# Altium PCB SmartIMU_Pcb.PcbDoc
Units mil, origin at the board's own origin, x right, y up, seen from the top; angles counter-clockwise.
Board outline 1000 x 1000 mil, 4 copper layers (Top Layer, Mid Layer 1, Mid Layer 2, Bottom Layer), stack 24.2 mil thick; 36 components, 43 nets, 211 pads, 74 vias.
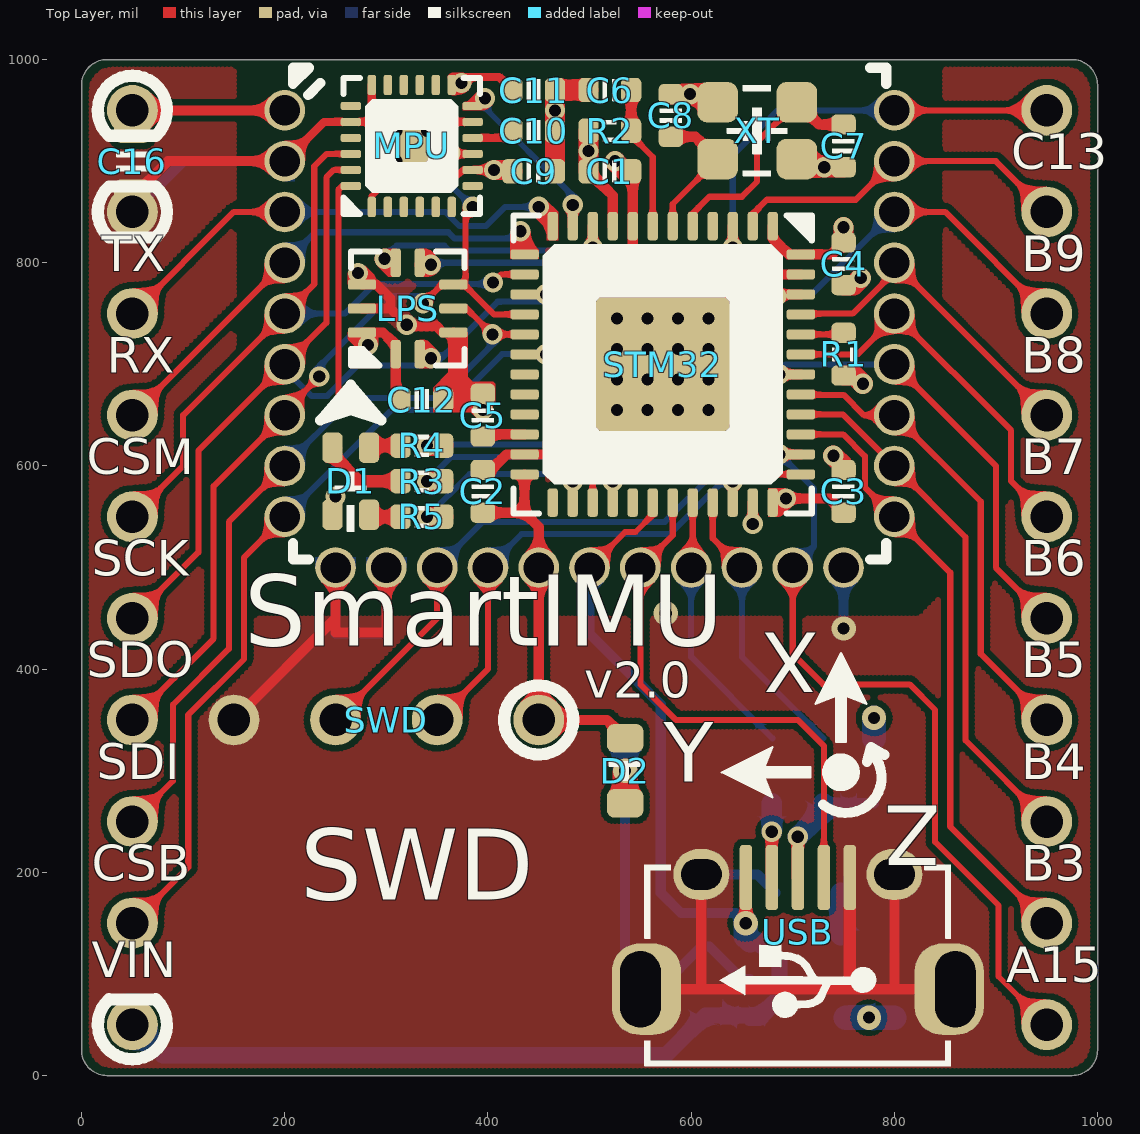
[diagram p0: Top Layer view]
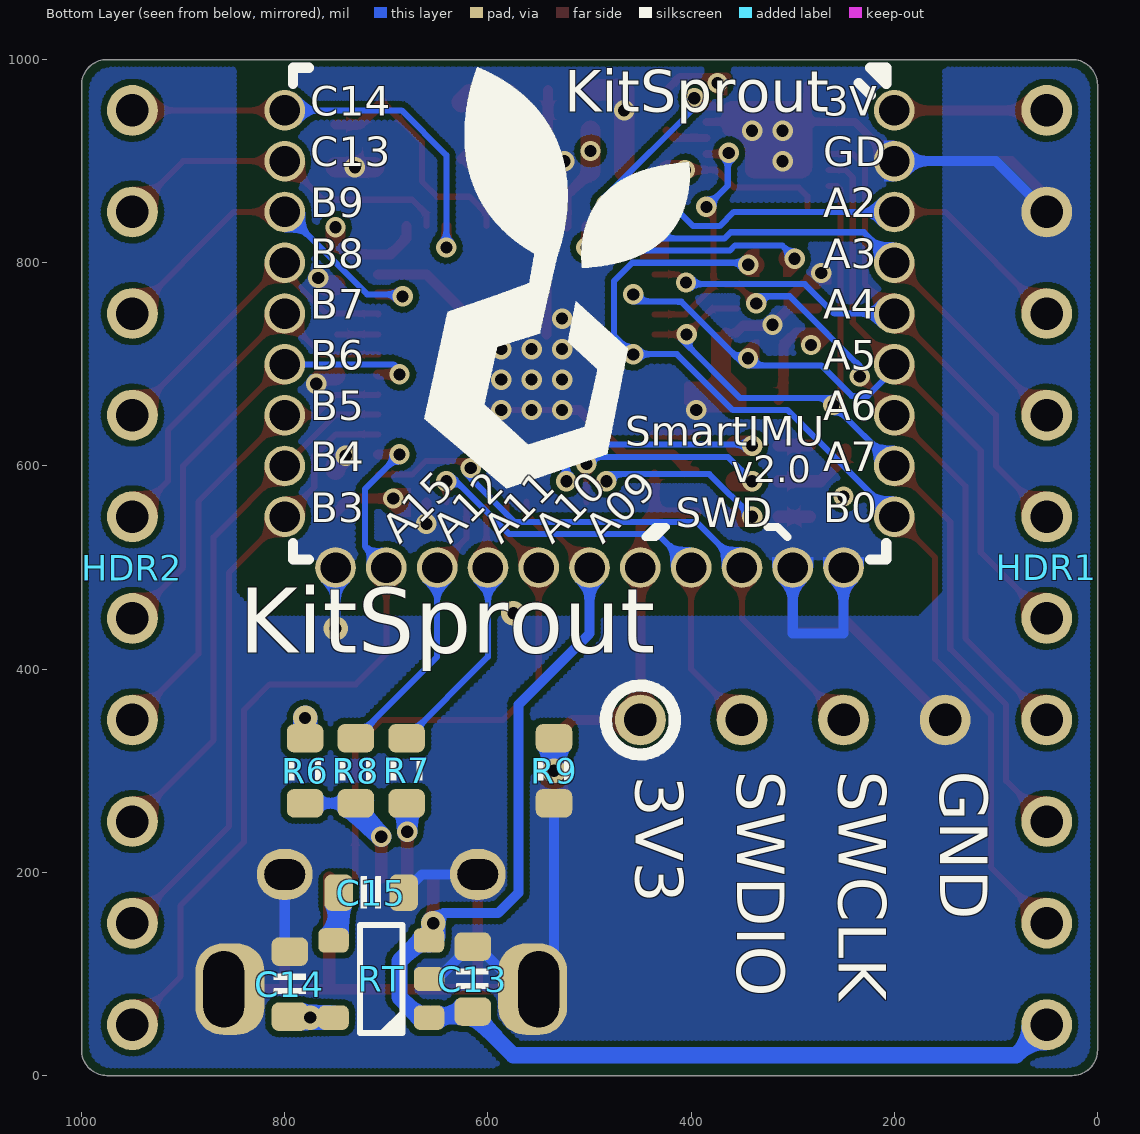
[diagram p1: Bottom Layer view, seen from below]
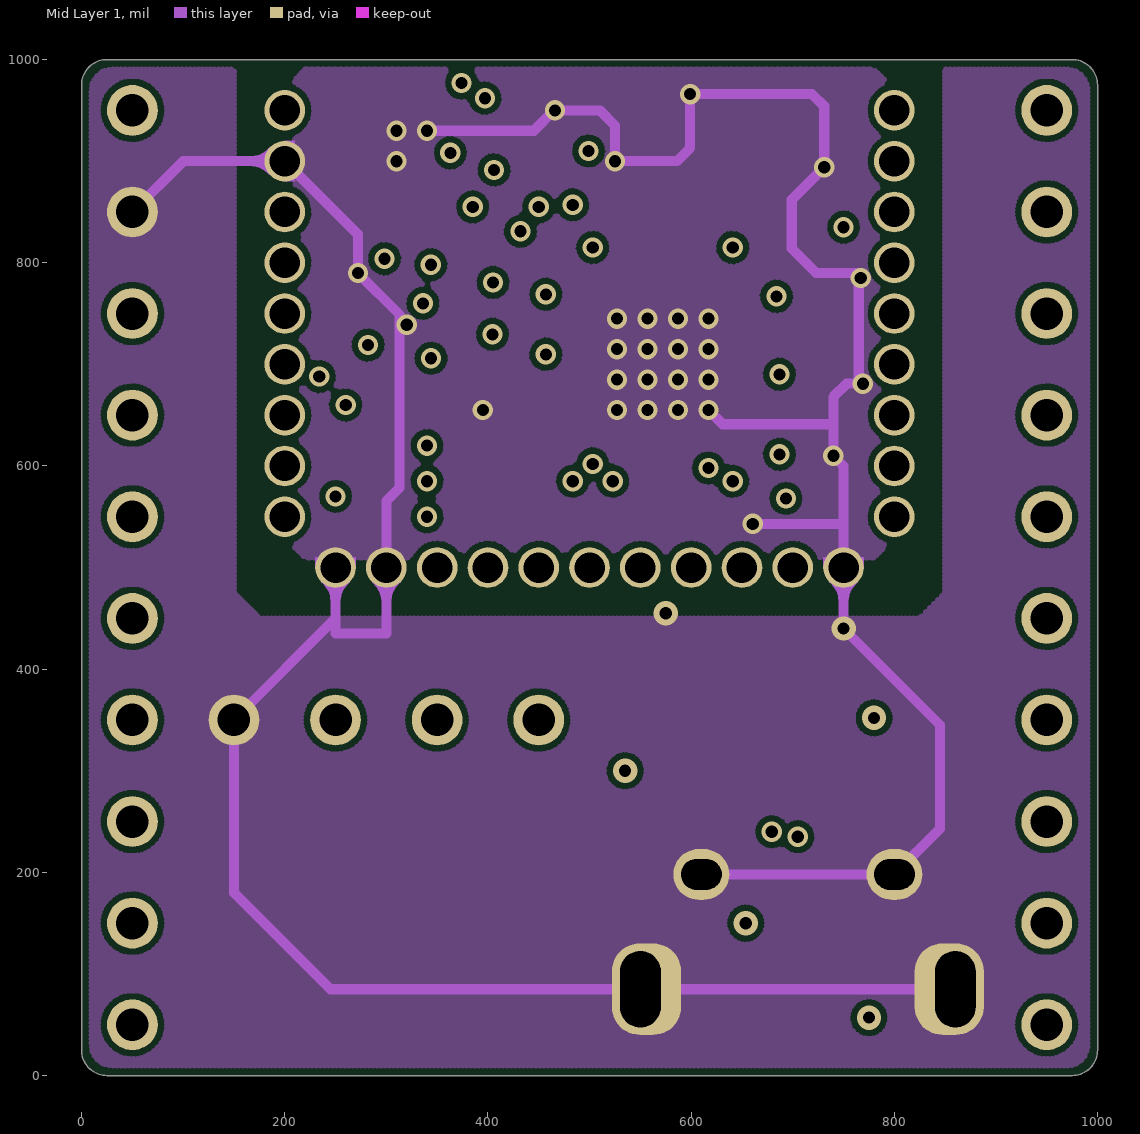
[diagram p2: Mid Layer 1]
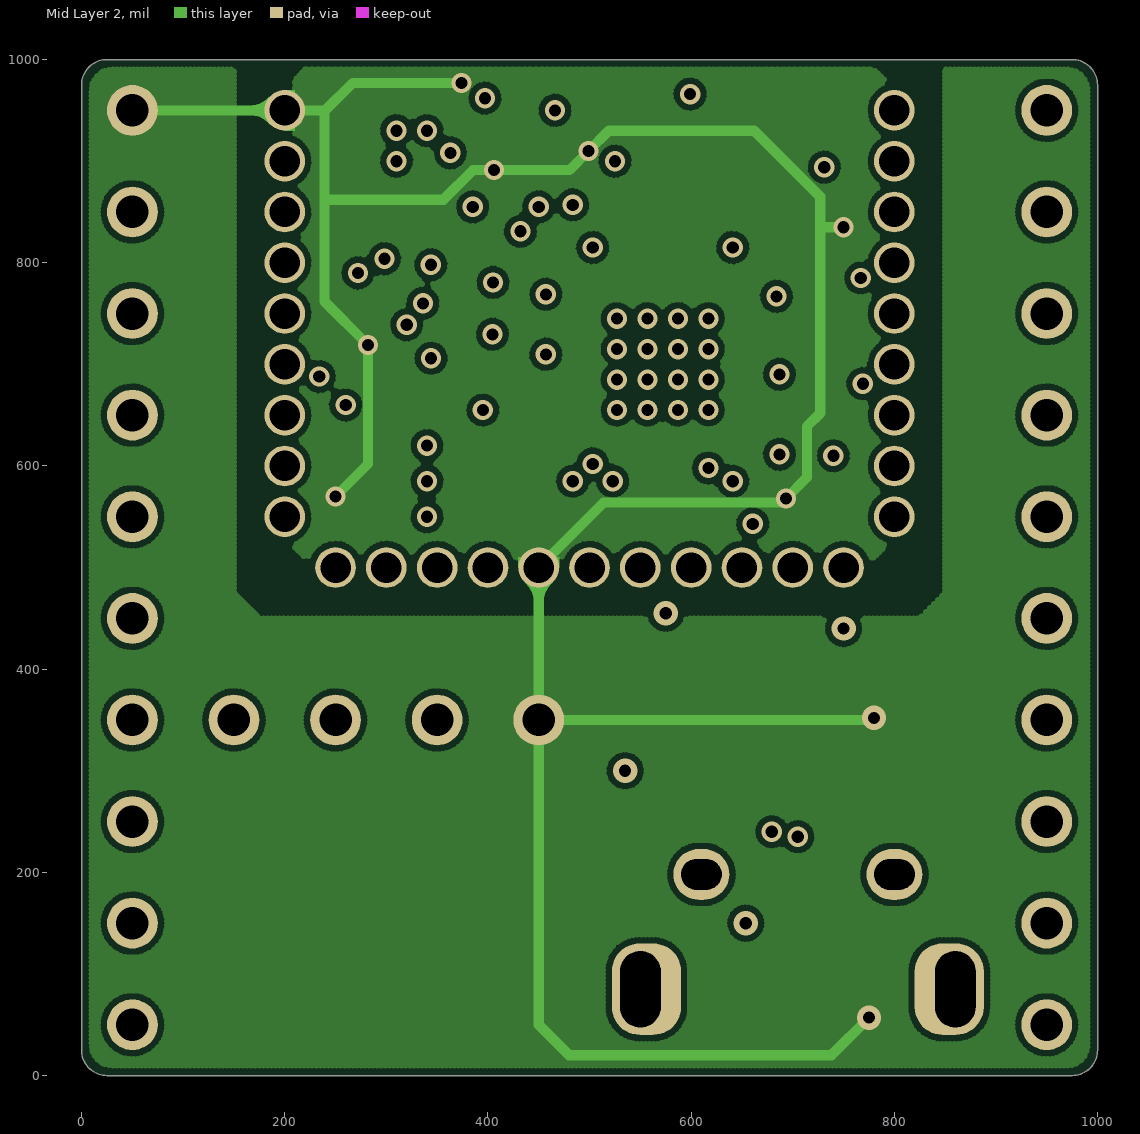
[diagram p3: Mid Layer 2]
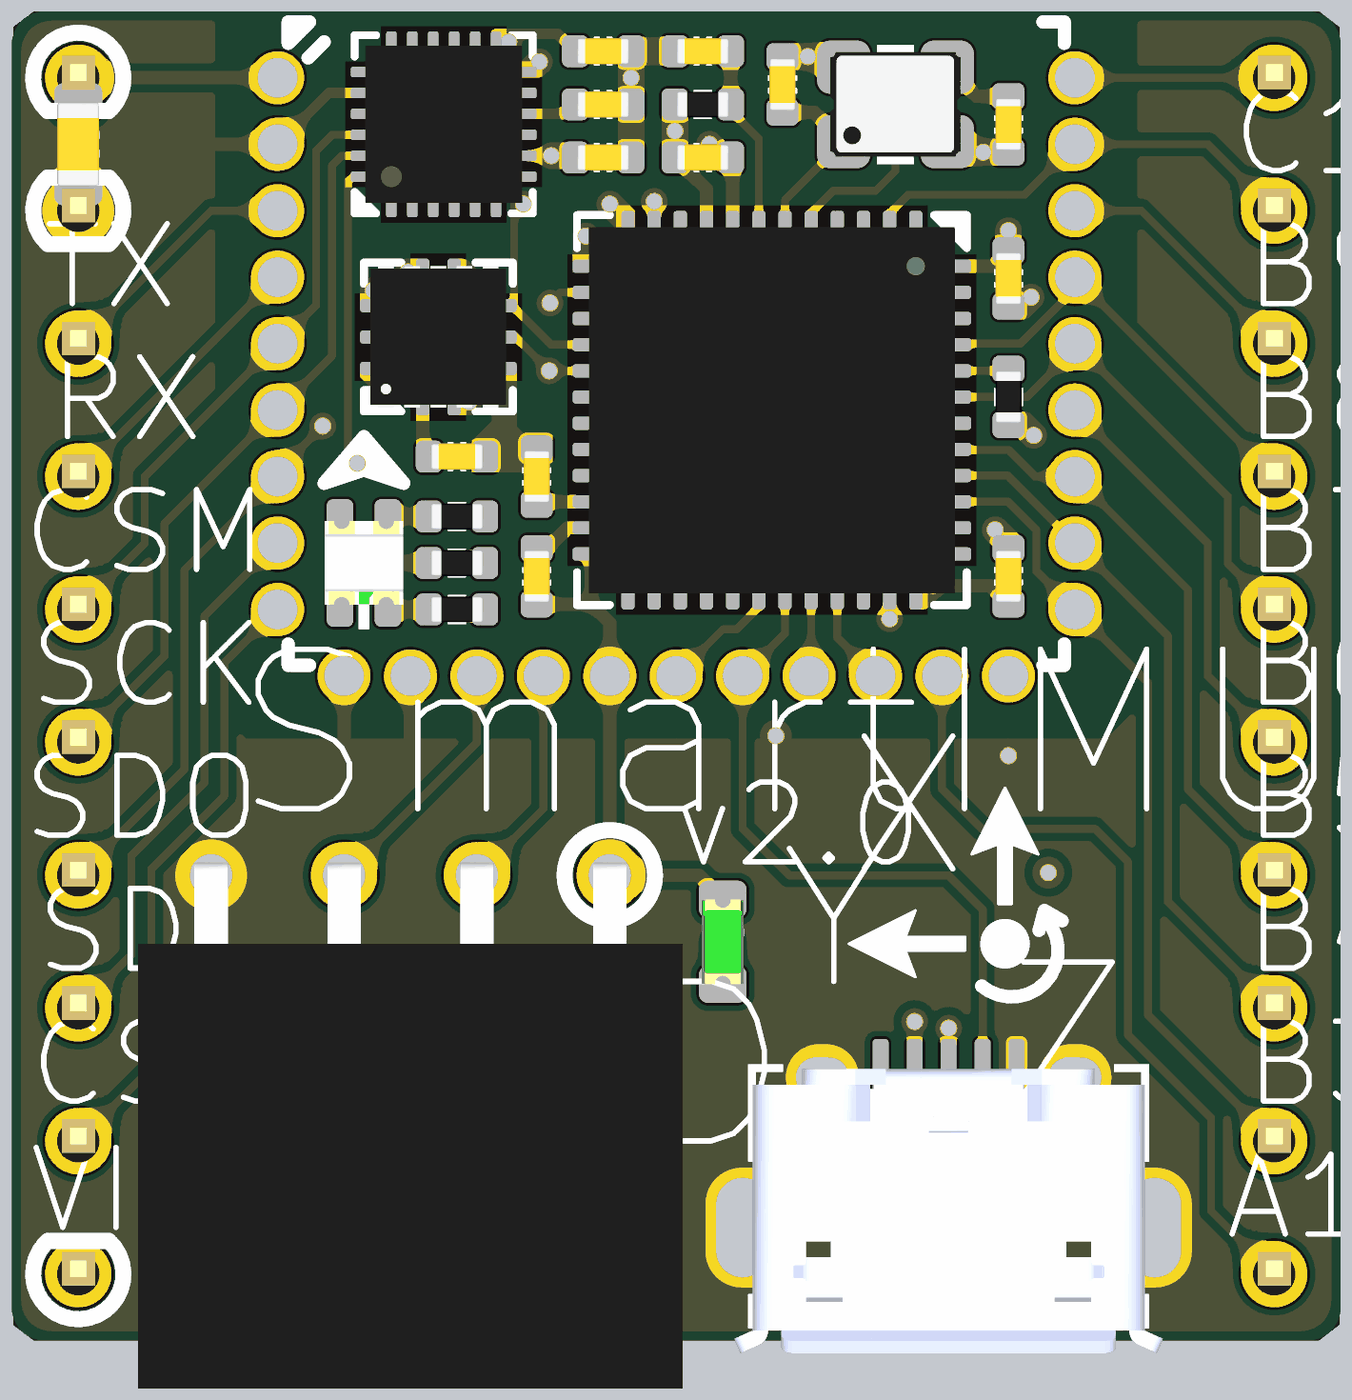
[diagram p4: 3D render of the assembled board from above, using the file's embedded part models]
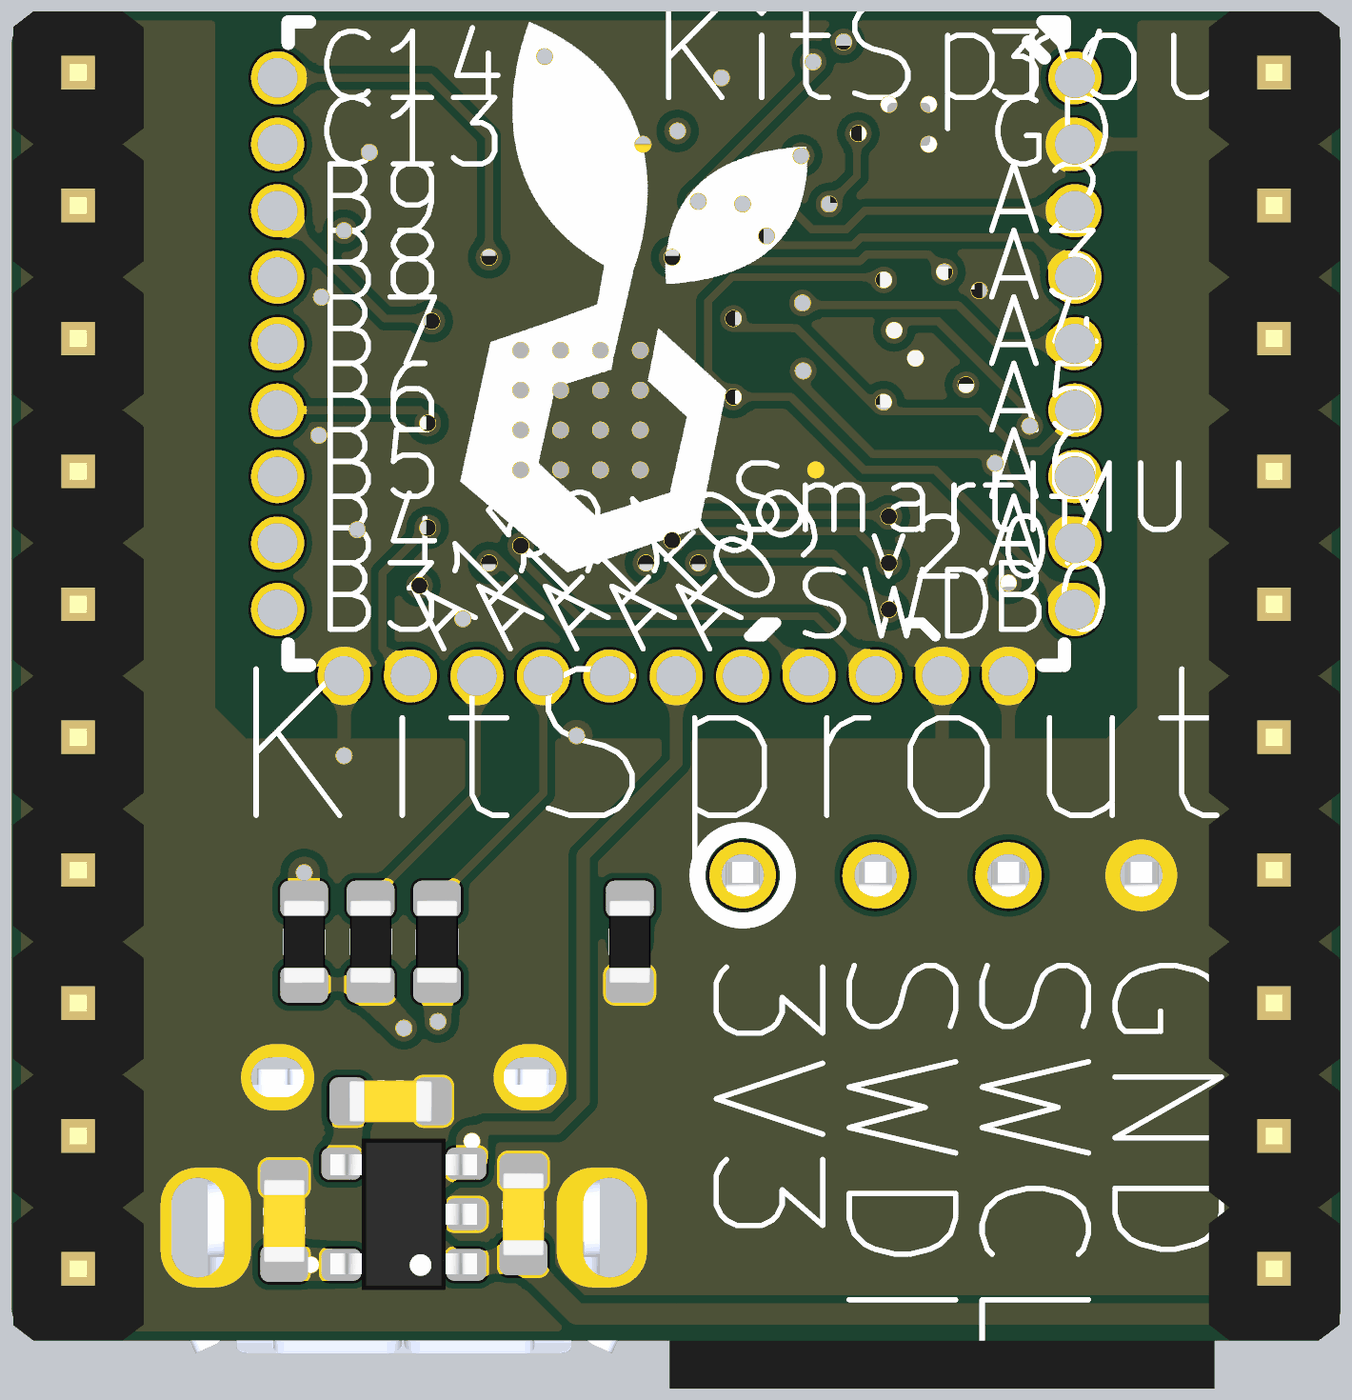
[diagram p5: 3D render of the assembled board from below, using the file's embedded part models]

## Layer stack, top to bottom
Top Solder: solder mask 0.4, Solder Resist, Dk 3.5
Top Layer: signal copper 1.4
Dielectric 1: prepreg 5, Dk 4.2
Mid Layer 1: signal copper 0.7
Dielectric 3: core 10, FR-4, Dk 4.2
Mid Layer 2: signal copper 0.7
Dielectric 2: prepreg 5, Dk 4.2
Bottom Layer: signal copper 1.4
Bottom Solder: solder mask 0.4, Solder Resist, Dk 3.5

## Board outline
0,25 ccw(c25,25) 25,0 975,0 ccw(c975,25) 1000,25 1000,975 ccw(c975,975) 975,1000 25,1000 ccw(c25,975) 0,975

## Design rules (kind name [scope] priority, off if disabled: settings)
Clearance ClearancePolygon [InPolygon] p1: gap=6
Clearance [All] p2: gap=6
ComponentClearance [All] p1: gap=0 collisioncheckmode=3 verticalgap=0 showdistances=FALSE
Height [All] p1: minheight=0 maxheight=5000 prefheight=500
HoleSize [All] p1: absolutevalues=TRUE maxlimit=200 minlimit=1 maxpercent=80.000 minpercent=20.000
HoleToHoleClearance [All] p1: gap=6 allowstackedmicrovias=TRUE
MinimumSolderMaskSliver [All] p1: minsoldermaskwidth=0
PolygonConnect [All] p1: connectstyle=Direct reliefconductorwidth=10 reliefentries=4 polygonreliefangle="90 Angle" airgapwidth=10
RoutingVias [All] p1: holewidth=12 width=24 viastyle="Through Hole" minholewidth=12 minwidth=20 maxholewidth=28 maxwidth=50
SilkToSilkClearance [All] p1: silktosilkclearance=0
SilkToSolderMaskClearance [IsPad] p1: minsilkscreentomaskgap=0 clearancetoexposedcopper=TRUE
SolderMaskExpansion [All] p1: expansion=2
Width [All] p1: maxlimit=50 minlimit=6 preferedwidth=10
23 further rules are at their usual default settings.

## Components (designator, comment, footprint, x,y, rotation, side; value= is the part's Value field where it differs from the comment)
C1 "Cap_0402" CAP_0402 520,890 r180 top
C2 "Cap_0402" CAP_0402 395,575 r270 top
C3 "Cap_0402" CAP_0402 750,575 r270 top
C4 "Cap_0402" CAP_0402 750,799 r90 top
C5 "Cap_0402" CAP_0402 395,650 r270 top
C6 "Cap_0402" CAP_0402 520,970 r180 top
C7 "Cap_0402" CAP_0402 750,915 r90 top
C8 "Cap_0402" CAP_0402 580,945 r270 top
C9 "Cap_0402" CAP_0402 445,890 r0 top
C10 "Cap_0402" CAP_0402 445,930 r0 top
C11 "Cap_0402" CAP_0402 445,970 r180 top
C12 "Cap_0402" CAP_0402 335,665 r0 top
C13 "Cap_0603" CAP_0603 615,95 r270 bottom
C14 "Cap_0603" CAP_0603 795,90 r270 bottom
C15 "Cap_0603" CAP_0603 715,180 r0 bottom
C16 "Cap_0603" CAP_0603 50,900 r270 top
D1 "LED_1616_RGB" LED_1616_RGB 265,585 r270 top
D2 "LED_0603" LED_0603_GREEN 535,300 r270 top
HDR1 "HDR1x10_2.54" HDR1X10_2.54_180 50,950 r180 bottom
HDR2 "HDR1x10_2.54T" HDR1X10_2.54_180 950,950 r180 bottom
LPS "LPS25Hx" HCLGA-10L 321,755 r90 top
MPU "MPU925x" QFN_P0.4_24 325,915 r90 top
R1 "Res_0402" RES_0402 750,710 r90 top
R2 "Res_0402" RES_0402 520,930 r180 top
R3 "Res_0402" RES_0402 335,585 r180 top
R4 "Res_0402" RES_0402 335,620 r180 top
R5 "Res_0402" RES_0402 335,550 r180 top
R6 "Res_0603" RES_0603 780,300 r270 bottom
R7 "Res_0603" RES_0603 680,300 r90 bottom
R8 "Res_0603" RES_0603 730,300 r90 bottom
R9 "Res_0603" RES_0603 535,300 r90 bottom
RT "RT9193" SOT23-5 705,95 r0 bottom
STM32 "STM32F4x1C" QFN_P0.5_48 572,700 r270 top
SWD "HDR1x4_2.54" HDR1X4_2.54_90F 450,350 r270 top (schematic designator SWD_H)
USB "USB_Micro" USB_Micro-AB 705,95 r180 top
XT "XTAL_2520_4P" XT_2520_4 665,930 r0 top

## Footprints (in the part's own frame and the unit in brackets; to place one, negate y for a bottom-side part, rotate by r counter-clockwise, add the part's x,y. Pads: shape width x height; smd on the part's side, far side on the other; paste and mask are expansions set on the pad)
CAP_0402 [mil]
  rrect50% 20x24 smd: 1(-21,0) 2(21,0)
  silkscreen extent -7,-10 7,10, body extent -20,-10 20,10, height 22
CAP_0603 [mil]
  rrect50% 28x36 smd: 1(-32,0) 2(32,0)
  silkscreen extent -10,-16 10,16, body extent -31,-16 31,16, height 36
HCLGA-10L [mil]
  rrect50% 28x10 smd: 1(-45,11.81) 2(-45,-11.81) 6(45,-11.81) 7(45,11.81)
  rrect50% 10x28 smd: 3(-23.62,-45) 4(0,-45) 5(23.62,-45) 8(23.62,45) 9(0,45) 10(-23.62,45)
  silkscreen extent -56,-56 56,56, body extent -53,-51 53,51, height 33
HDR1X4_2.54_90F [mil]
  round 50 hole 32: 1(0,0) 2(0,-100) 3(0,-200) 4(0,-300)
  body extent -10,-355 386,55, height 99
HDR1X10_2.54_180 [mil]
  round 50 hole 32: 1(0,0) 2(0,-100) 3(0,-200) 4(0,-300) 5(0,-400) 6(0,-500) 7(0,-600) 8(0,-700) 9(0,-800) 10(0,-900)
  body extent -49,-950 49,50, height 323
LED_0603_GREEN [mil]
  rrect50% 28x36 smd: 1(-32,0) 2(32,0)
  silkscreen extent -10,-16 10,16, body extent -32,-16 32,16, height 24
LED_1616_RGB [mil]
  rrect50% 30x20 smd: 1(-33,-18) 2(-33,18) 3(33,18) 4(33,-18)
  silkscreen extent -10,-16 50,16, body extent -31,-30 31,30, height 13
QFN_P0.4_24 [mil]
  rrect20% 32x32 smd: 0(0,0)
  rrect50% 20x8 smd: 1(-60,39.37) 2(-60,23.62) 3(-60,7.87) 4(-60,-7.87) 5(-60,-23.62) 6(-60,-39.37) 13(60,-39.37) 14(60,-23.62) 15(60,-7.87) 16(60,7.87) 17(60,23.62) 18(60,39.37)
  rrect50% 8x20 smd: 7(-39.37,-60) 8(-23.62,-60) 9(-7.87,-60) 10(7.87,-60) 11(23.62,-60) 12(39.37,-60) 19(39.37,60) 20(23.62,60) 21(7.87,60) 22(-7.87,60) 23(-23.62,60) 24(-39.37,60)
  silkscreen extent -67,-67 67,67, body extent -59,-59 59,59, height 35
QFN_P0.5_48 [mil]
  rrect10% 132x132 smd: 0(0,0)
  rrect50% 28x10 smd: 1(-136,108.27) 2(-136,88.58) 3(-136,68.9) 4(-136,49.21) 5(-136,29.53) 6(-136,9.84) 7(-136,-9.84) 8(-136,-29.53) 9(-136,-49.21) 10(-136,-68.9) 11(-136,-88.58) 12(-136,-108.27) 25(136,-108.27) 26(136,-88.58) 27(136,-68.9) 28(136,-49.21) 29(136,-29.53) 30(136,-9.84) 31(136,9.84) 32(136,29.53) 33(136,49.21) 34(136,68.9) 35(136,88.58) 36(136,108.27)
  rrect50% 10x28 smd: 13(-108.27,-136) 14(-88.58,-136) 15(-68.9,-136) 16(-49.21,-136) 17(-29.53,-136) 18(-9.84,-136) 19(9.84,-136) 20(29.53,-136) 21(49.21,-136) 22(68.9,-136) 23(88.58,-136) 24(108.27,-136) 37(108.27,136) 38(88.58,136) 39(68.9,136) 40(49.21,136) 41(29.53,136) 42(9.84,136) 43(-9.84,136) 44(-29.53,136) 45(-49.21,136) 46(-68.9,136) 47(-88.58,136) 48(-108.27,136)
  silkscreen extent -147,-147 147,147, body extent -138,-138 138,138, height 31
RES_0402 [mil]
  rrect50% 20x24 smd: 1(-21,0) 2(21,0)
  silkscreen extent -7,-10 7,10, body extent -20,-10 20,10, height 16
RES_0603 [mil]
  rrect50% 28x36 smd: 1(-32,0) 2(32,0)
  silkscreen extent -10,-16 10,16, body extent -31,-16 32,16, height 20
SOT23-5 [mil]
  rrect50% 30x24 smd: 1(-47,38) 2(-47,0) 3(-47,-38) 4(47,-38) 5(47,38)
  silkscreen extent -21,-53 21,53, body extent -55,-57 55,57, height 57
USB_Micro-AB [mil]
  rrect80% 68x90 hole 40 slot 75 at 90 deg copper offset 6,0 mask+0: 0(-155,10)
  oval 55x50 hole 30 slot 40 at 0 deg mask+0: 0(-95,-103) 0(95,-103)
  rrect80% 68x90 hole 40 slot 75 at 90 deg copper offset -6,0 mask+0: 0(155,10)
  rrect50% 12x64 smd: 1(51.18,-100) 2(25.59,-100) 3(0,-100) 4(-25.59,-100) 5(-51.18,-100)
  silkscreen extent -150,-113 150,86, body extent -161,-109 161,104, height 108
XT_2520_4 [mil]
  rrect50% 40x40 smd: 1(39,28) 2(-39,28) 3(-39,-28) 4(39,-28)
  silkscreen extent -30,-44 30,44, body extent -49,-39 49,39, height 31

## Part data
C1 C2 C3 C4 C5 C6 C7 C8 C9 C10 C11 C12 C13 C14 C15 C16: "Capacitor"
D1 D2: "LED"
HDR1 HDR2 SWD: "Header"
LPS: "Sensor Pressure"
MPU: "Sensor Motion"
R1 R2 R3 R4 R5 R6 R7 R8 R9: "Resistor"
RT: "Power"
STM32: "MCU"
USB: "USB"
XT: "Crystal Oscillator"

## Free pads (board coordinates)
  round 40 hole 30: 0(200,550) 0(200,600) 0(200,650) 0(200,700) 0(200,750) 0(200,800) 0(200,850) 0(200,900) 0(200,950) 0(250,500) 0(300,500) 0(350,500) 0(400,500) 0(450,500) 0(500,500) 0(550,500) 0(600,500) 0(650,500) 0(700,500) 0(750,500) 0(800,550) 0(800,600) 0(800,650) 0(800,700) 0(800,750) 0(800,800) 0(800,850) 0(800,900) 0(800,950)

## Via types
v1: diameter 20, hole 12, Top Layer to Bottom Layer, 68 vias
v2: diameter 24, hole 12, Top Layer to Bottom Layer, 6 vias

## Nets (pads, with @x,y where several pads share a name; then routed paths per layer and width w, separated by ;. In a path a pad name is that pad's centre, name@x,y a point inside that pad or via, vN(x,y) a via of type N, cw(c..) or ccw(c..) an arc to the next point about the centre after c; other vN are vias at no path point)
3V3: C1.2 C2.2 C3.2 C4.2 C9.1 C11.2 C12.1 C14.2 C16.1 D1.4 D2.1 HDR1.1 LPS.1 LPS.10 MPU.1 MPU.8 MPU.13 pad.0@200,950 pad.0@450,500 R2.2 R6.1 RT.5 STM32.1 STM32.9 STM32.24 STM32.36 STM32.48 SWD.1 | length 4217.9
  Top Layer w6: MPU.1 285.63,865.63 294,874 357.81,874 375.19,891.38 MPU.8
  Top Layer w8: MPU.13@364.37,983 411,983 C11.2 ; MPU.8 v1(406,891.38)
  Top Layer w10: HDR1.1 pad.0@200,950 ; LPS.10 296.62,731.38 309.19,718.81 309.19,669.81 C12.1 ; C2.2 436,554 ; STM32.24 436,554 ; C1.2 522.79,866.21 STM32.9 ; D2.1 517,350 SWD.1 450,500 450,540 436,554 ; STM32.1 680.27,823.73 695.73,808.27 STM32.48 738.27,808.27 C4.2 ; v1(693.27,568) 736,568 C3.2
  Top Layer w20: v1(406,891.38) 422.62,891.38 C9.1 ; C1.2 R2.2 ; C4.2 v1(750,835)
  Mid Layer 2 w10: HDR1.1 200,950 239,950 239,862 ; 240,950 267,977 v1(374,977) ; v1(250,570) 282,602 v1(282,719) 239,762 239,862 ; v1@693.27,564 514,564 450,500 SWD.1 ; v1(693.27,568) 714,588.73 714,639 727,652 727,865 662,930 519,930 v1(499,910) 480.38,891.38 v1(406,891.38) 385.38,891.38 356,862 239,862 ; 727,835 v1(750,835) ; v2(775,57) 738,20 480,20 450,50 SWD.1 ; v2@780,350 SWD.1
  Bottom Layer w24: RT.5 C14.2@800,57 ; R6.1 v2(780,352)
BOOT: R1.2 STM32.44 | length 40.5
  Top Layer w6: STM32.44 R1.2@748.53,729.53
CSB: HDR1.9 LPS.6 pad.0@200,550 STM32.18 | length 1002.9
  Top Layer w6: HDR1.9 105,205 105,355 160,410 160,510 pad.0@200,550
  Top Layer w20: LPS.6@337.81,798 v1(343.81,798)
  Bottom Layer w6: pad.0@200,550 305,655 359,655 414,710 v1@457,710 ; v1@352,800 458,800 476,782 476,728.84 v1(457,709.84)
CSM: HDR1.5 MPU.22 pad.0@200,750 STM32.14 | length 713.5
  Top Layer w6: HDR1.5 100,600 100,650 200,750 229,779 229,895 241.13,907.13 MPU.22 ; v1(405,780.58) 413,788.58 STM32.14
  Bottom Layer w6: pad.0@200,750 259,750 288,779 v1@407,779
GND: C1.1 C2.1 C3.1 C4.1 C5.1 C6.2 C7.1 C8.1 C9.2 C10.2 C11.1 C12.2 C13.1 C14.1 C15.1 C16.2 HDR1.2 LPS.3 LPS.8 LPS.9 MPU.0 MPU.11 MPU.18 MPU.20 pad.0@200,900 pad.0@250,500 pad.0@300,500 pad.0@750,500 R1.1 R9.1 RT.2 STM32.0 STM32.8 STM32.23 STM32.35 STM32.47 SWD.4 USB.0 USB.5 XT.2 XT.4 | length 7019.8
  Top Layer w6: LPS.3@355.62,731.38 LPS.3 ; C12.2 C12.2@362,671 ; C2.1 C2.1@403,596 ; C6.2@498,969 C6.2 ; v1(527,655) v1(617,655)
  Top Layer w8: pad.0@200,900 238.62,938.62 301.38,938.62 MPU.0 348.62,938.62 MPU.11 ; 285.63,938.62 MPU.18
  Top Layer w10: HDR1.2 50,865 85,900 pad.0@200,900 ; SWD.4 250,450 ; pad.0@250,500 250,436 300,436 pad.0@300,500 ; LPS.9 304,755 ; LPS.8 290,778.62 304,764.62 304,755 ; v1@317,738 349,738 LPS.3@355.62,731.38 ; v1(320,739) 304,755 ; C12.2@362,671 C5.1 ; 366,675 LPS.3 ; C2.1@403,596 418.42,611.42 466.42,611.42 510,655 v1(527,655) ; STM32.0@542.47,729.53 STM32.8 C1.1@542.47,888.53 ; USB.0@550,85 610,85 ; USB.0@610,198 610,85 ; v1(617,745) 660.58,788.58 STM32.47 ; v1(660.58,543) STM32.35 ; USB.0@800,198 800,85 ; USB.0@860,85 800,85 ; 610,85 800,85
  Top Layer w12: 756.18,88.82 USB.5
  Top Layer w20: v1(395,655) C5.1 ; C9.2 v1(466,950) C11.1 C6.2 ; v1(525,900) C1.1@536.47,888.53 ; C8.1 618,966 XT.2 ; XT.4@712,894 C7.1 ; v1(740,610) 750,600 C3.1 ; R1.1 761,689 v1(769,681) ; C4.1 760,778 v1(767,785)
  Mid Layer 1 w10: HDR1.2 100,900 200,900 272,828 v1(272,790) 313,749 313,578.5 300,565.5 300,500 300,435 250,435 pad.0@250,500 ; 250,450 SWD.4 150,180 245,85 USB.0@860,85 ; v1(340,930) 445,930 465,950 v1(466,950) 510,950 525,935 v1(525,900) 586,900 599,913 v1(599,966) 719,966 731,954 v1(731,894) 699,862 699,814 723,790 765,790 v1@765,685 ; USB.0@610,198 800,198 845,243 845,345 v2(750,440) 750,500 750,600 v1(740,610) 740,641 ; v1(617,655) 631,641 740,641 ; v1(660.58,543) 748,543 ; v1(769,681) 753,681 740,668 740,641
  Bottom Layer w10: HDR1.2 100,900 pad.0@200,900 ; pad.0@250,500 250,435 300,435 pad.0@300,500 ; USB.0@535,100 R9.1 ; USB.0@550,85 568,85 610,127 618,127 650,95 RT.2 ; USB.0@610,198 665,198 C15.1 ; v2(750,440) pad.0@750,500 ; C14.1@800,122 USB.0@800,198
  other v1: 557,655 587,655 527,685 557,685 587,685 617,685 527,715 557,715 587,715 617,715 527,745 557,745 587,745 310,900 310,930
  other v2: 575,455
GPIO1: HDR2.10 pad.0@700,500 STM32.38 | length 758.5
  Top Layer w6: pad.0@700,500 700,415 730,385 815,385 840,360 840,230 902.5,167.5 902.5,97.5 HDR2.10
  Top Layer w10: v1(687,611.42) STM32.38
  Bottom Layer w6: v1(687,611.42) 721,577.42 721,521 pad.0@700,500
GPIO2: HDR2.9 pad.0@800,550 STM32.39 | length 605.7
  Top Layer w6: STM32.39 749.63,631.1 771,609.73 771,579 800,550 855,495 855,245 HDR2.9
GPIO3: HDR2.8 pad.0@800,600 STM32.40 | length 525.2
  Top Layer w6: STM32.40 749.21,650.79 800,600 870,530 870,330 HDR2.8
GPIO4: HDR2.7 pad.0@800,650 STM32.41 | length 462.6
  Top Layer w6: STM32.41 708.47,670 750,670 770,650 800,650 885,565 885,415 HDR2.7
GPIO5: HDR2.6 pad.0@800,700 STM32.42 | length 454.2
  Top Layer w6: pad.0@800,700 900,600 900,500 HDR2.6
  Top Layer w10: v1(687,690.16) STM32.42
  Bottom Layer w6: v1@683,690.16 692.84,700 pad.0@800,700
GPIO6: HDR2.5 pad.0@800,750 STM32.43 | length 376.7
  Top Layer w6: STM32.43 763.84,709.84 pad.0@800,746 ; pad.0@800,745.27 pad.0@800,746 ; pad.0@802,748 pad.0@800,746 ; HDR2.5 915,585 915,635 800,750 pad.0@800,746
GPIO7: HDR2.4 pad.0@800,800 STM32.45 | length 330.9
  Top Layer w6: STM32.45 708,750 758.99,750 787.99,779 800,791 800,800 HDR2.4
GPIO8: HDR2.3 pad.0@800,850 STM32.46 | length 370.1
  Top Layer w6: pad.0@800,850 850,850 HDR2.3
  Top Layer w10: v1@684,768.9 STM32.46
  Bottom Layer w6: v1@687,768.9 718.9,768.9 800,850 pad.0@791.87,850
  other v1: 684,766.9
GPIO9: HDR2.2 pad.0@800,900 STM32.2 | length 343.7
  Top Layer w6: STM32.2 660.58,848.04 674.54,862 762,862 800,900 900,900 HDR2.2
GPIO10: HDR2.1 pad.0@800,950 STM32.3 | length 439.3
  Top Layer w6: pad.0@800,950 HDR2.1
  Top Layer w10: v1(640.9,815) STM32.3
  Bottom Layer w6: v1(640.9,815) 640.9,905.9 685,950 pad.0@800,950
INTB: LPS.7 STM32.10 | length 237.3
  Top Layer w10: v1(503.1,815) STM32.10
  Top Layer w20: v1(298.19,804) LPS.7@304.19,804
  Bottom Layer w6: v1@297.19,804 310.19,817 357,817 362,812 v1@500,812
INTM: MPU.12 STM32.11 | length 157.8
  Top Layer w10: STM32.11 v1(483.42,857)
  Bottom Layer w6: v1@390.71,958.71 v1@487.42,862
  other v1: 397,962
LED_B: R5.1 STM32.26 | length 177.4
  Top Layer w20: v1(340,550) R5.1
  Bottom Layer w6: v1(340,550) 382,592 v1@484,592
  other v1: 483.42,585
LED_G: R4.1 STM32.28 | length 227.9
  Top Layer w20: v1(340,620) R4.1
  Bottom Layer w6: v1@340,621 511,621 522.79,609.21 v1(522.79,585)
LED_R: R3.1 STM32.27 | length 225.8
  Top Layer w6: STM32.27 v1@503.1,599.9
  Top Layer w20: v1(340,585) R3.1
  Bottom Layer w6: v1(340,585) 364,609 v1@504,609
  other v1: 503.1,602
NetC15_2: C15.2 RT.4 | length 42
  Bottom Layer w20: RT.4@747,138 C15.2
NetD1_1: D1.1 R3.2 | length 82.3
  Top Layer w12: D1.1@248,616 248,610.03 273.03,585 R3.2
NetD1_2: D1.2 R4.2 | length 31
  Top Layer w12: D1.2@283,620 R4.2
NetD1_3: D1.3 R5.2 | length 31
  Top Layer w12: D1.3@283,550 R5.2
NetD2_2: D2.2 R9.2 | length 64
  Top Layer w24: D2.2 v2(535,300)
  Bottom Layer w24: v2(535,300) R9.2
NetR6_2: R6.2 R8.1 USB.3 | length 133.4
  Top Layer w12: USB.3 v1(705,235)
  Bottom Layer w10: R8.1 R6.2
  Bottom Layer w20: v1(705,235) 730,260 R8.1
NetR7_1: R7.1 USB.2 | length 73
  Top Layer w12: USB.2 v1(679.41,240)
  Bottom Layer w20: v1(679.41,240) R7.1@679.41,268
REG: C10.1 MPU.10 | length 42
  Top Layer w8: MPU.10 416.87,922.87 C10.1
RST: C6.1 R2.1 STM32.7 | length 139.8
  Top Layer w6: R2.1@541,925.27 562.16,904.11 STM32.7 ; R2.1@541,928.27 R2.1
  Top Layer w10: R2.1 C6.1
RX: HDR1.4 pad.0@200,800 STM32.13 | length 497.6
  Top Layer w6: HDR1.4 85,685 pad.0@200,800 ; v1(432,831) 432,812.27 STM32.13
  Bottom Layer w6: pad.0@210,790 200,800 230,830 361,830 367,824 v1@432,824
SCK: HDR1.6 LPS.2 MPU.23 pad.0@200,700 STM32.15 | length 845.6
  Top Layer w6: HDR1.6 115,515 115,615 200,700 241,741 241,884 248.38,891.38 MPU.23
  Bottom Layer w6: pad.0@200,700 200,695.13 226.13,669 242,669 272,699 v1@344,699 ; v1@349,701 409.58,761.58 412.87,761.58 413.29,762 v1@457,762
  other v1: 344,706 457,768.9
SDI: HDR1.8 LPS.4 MPU.24 pad.0@200,600 STM32.17 | length 1008.5
  Top Layer w6: HDR1.8 90,290 90,365 145,420 145,545 200,600 pad.0@200,608.99 ; v1@253,660 253,872 256.63,875.63 MPU.24 ; LPS.4@355,755 LPS.4 ; LPS.4@376,755 LPS.4 ; STM32.17 v1(404.47,729.53) 379,755 LPS.4
  Bottom Layer w6: pad.0@200,600 v1@261,661 ; v1@260,667 352,667 v1@410,725
  other v1: 260,660
SDO: HDR1.7 LPS.5 MPU.9 pad.0@200,650 STM32.16 | length 816.6
  Top Layer w6: HDR1.7 130,430 130,580 pad.0@200,650 ; pad.0@200,654 v1(234,688) ; v1(336,760) 354.62,778.62 LPS.5 ; v1@378,855 378,777 405.79,749.21 STM32.16
  Top Layer w8: v1@363,907.13 MPU.9
  Bottom Layer w6: v1@228.5,692.5 303,767 v1@336,767 ; v1@364,907.13 364,876 v1(385,855)
  other v1: 363,908.13
SWCLK: pad.0@350,500 STM32.37 SWD.3 | length 598.4
  Top Layer w6: SWD.3 350,450 pad.0@350,500 ; v1@617,605 661,605 674.27,591.73 STM32.37
  Bottom Layer w6: pad.0@350,500 395,545 574,545 v1@622,593
  other v1: 617,598
SWDIO: pad.0@400,500 STM32.34 SWD.2 | length 461.1
  Top Layer w6: SWD.2 400,400 pad.0@400,500 ; STM32.34 v1@640.9,581.1
  Bottom Layer w6: pad.0@400,500 433,533 579,533 v1@636,590
  other v1: 640.9,585
TX: HDR1.3 pad.0@200,850 STM32.12 | length 479.8
  Top Layer w6: HDR1.3 150,850 pad.0@200,850
  Top Layer w10: v1(450,855) 463.73,841.27 STM32.12
  Bottom Layer w6: pad.0@200,850 358,850 372,836 398,836 417,855 v1(450,855)
USB.DM: pad.0@600,500 R7.2 STM32.32 | length 261.8
  Top Layer w6: pad.0@601.53,501.53 STM32.32@601.53,560
  Top Layer w10: pad.0@600,500 pad.0@601.53,501.53
  Bottom Layer w6: pad.0@600,500 600,412 R7.2
USB.DP: pad.0@650,500 R8.2 STM32.33 | length 277.1
  Top Layer w6: STM32.33 621.21,528.79 pad.0@650,500
  Bottom Layer w6: pad.0@650,500 650,412 R8.2
USB.ID: pad.0@550,500 STM32.31 USB.4 | length 528.3
  Top Layer w6: STM32.31@581.84,565 581.84,531.84 550,500 550,385 585,350 705,350 730.59,324.41 USB.4
USB.VB: C13.2 HDR1.10 pad.0@500,500 RT.1 RT.3 STM32.30 USB.1 | length 1353.6
  Top Layer w6: pad.0@500,500 535,535 545.2,535 562.16,551.96 STM32.30@562.16,565
  Top Layer w12: v2(653.82,150) USB.1
  Bottom Layer w10: pad.0@500,500 500,435 570,365 570,180 590,160 643.82,160 v2(653.82,150)
  Bottom Layer w16: HDR1.10 80,20 575,20 614,59 656,59 RT.1 667,57 687,77 687,112.8 666.8,133 RT.3
  Bottom Layer w24: v2(653.82,150) 653.82,137.18 RT.3
VCAP: C5.2 STM32.22 | length 41
  Top Layer w10: C5.2@395,631.1 STM32.22
XT_I: C7.2 STM32.5 XT.1 | length 238.3
  Top Layer w6: STM32.5 601.53,848.53 618,865 650,865 665,880 665,919 XT.1
  Top Layer w10: XT.1 726,936 C7.2
XT_O: C8.2 STM32.6 XT.3 | length 139.4
  Top Layer w6: STM32.6 581.84,857.84 XT.3
  Top Layer w10: C8.2 604,924 XT.3
pads on no net: MPU.2 MPU.3 MPU.4 MPU.5 MPU.6 MPU.7 MPU.14 MPU.15 MPU.16 MPU.17 MPU.19 MPU.21 STM32.4 STM32.19 STM32.20 STM32.21 STM32.25 STM32.29

## Polygon pours and split planes (outlines as drawn)
GND on Top Layer "Top Layer-No Net" (hatched 90Degree grid 4 track 6, remove dead copper, pour order 16): 170,990 30,990 ccw(c30,970) 10,970 10,30 ccw(c30,30) 30,10 970,10 ccw(c970,30) 990,30 990,970 ccw(c970,970) 970,990 830,990 830,475 825,470 175,470 170,475
GND on Top Layer "Top Layer-No Net" (hatched 90Degree grid 4 track 6, remove dead copper, pour order 6): 458,586 686,586 685.95,814 458,814
GND on Top Layer "Top Layer-No Net" (hatched 45Degree grid 4 track 6, remove dead copper, pour order 4): 296,782 347,782 cw(c347,781) 348,781 348,736 cw(c347,736) 347,735 304,735 cw(c304,743) 296,743
GND on Bottom Layer "Top Layer-No Net" (hatched 45Degree grid 4 track 6, remove dead copper, pour order 8): 240,990 220,990 210,980 210,520 220,510 780,510 790,520 790,980 780,990
GND on Bottom Layer "Top Layer-No Net" (hatched 90Degree grid 4 track 6, remove dead copper, pour order 28): 170,990 30,990 ccw(c30,970) 10,970 10,30 ccw(c30,30) 30,10 970,10 ccw(c970,30) 990,30 990,970 ccw(c970,970) 970,990 830,990 830,475 825,470 175,470 170,475
GND on Mid Layer 1 "Top Layer-No Net" (hatched 45Degree grid 4 track 6, remove dead copper, pour order 10): 240,990 220,990 210,980 210,520 220,510 780,510 790,520 790,980 780,990
GND on Mid Layer 1 "Top Layer-No Net" (hatched 90Degree grid 4 track 6, remove dead copper, pour order 26): 170,990 30,990 ccw(c30,970) 10,970 10,30 ccw(c30,30) 30,10 970,10 ccw(c970,30) 990,30 990,970 ccw(c970,970) 970,990 830,990 830,475 825,470 175,470 170,475
3V3 on Mid Layer 2 "Top Layer-No Net" (hatched 45Degree grid 4 track 6, remove dead copper, pour order 12): 240,990 220,990 210,980 210,520 220,510 780,510 790,520 790,980 780,990
3V3 on Mid Layer 2 "Top Layer-No Net" (hatched 90Degree grid 4 track 6, remove dead copper, pour order 24): 170,990 30,990 ccw(c30,970) 10,970 10,30 ccw(c30,30) 30,10 970,10 ccw(c970,30) 990,30 990,970 ccw(c970,970) 970,990 830,990 830,475 825,470 175,470 170,475

## Other copper
Top Layer:
  region net GND: 361,731.38 361,692 346,677 346,653 383,653 388,648 395,655 401,655 407,661 407,681 405,683 385.02,683 380,688.02 380,726 380,731.38
  pour cut-out: 850,1000 850,475 825,450 175,450 150,475 150,1000 220,1000 220,520 780,520 780,1000
  region net INTB: 298.19,804 291.19,797 302,786 309.19,786 309.19,814 298.19,814
  region net GND: 281,894 281,930 ccw(c276,930) 276,935 275,936 275,942 ccw(c275,949) 282,949 282,965 289,965 ccw(c295,965) 295,959 360,959 cw(c360,950) 369,950 369,948 ccw(c375,948) 375,942 375,936.1 373.92,935.01 ccw(c373.92,930.01) 368.92,930.01 cw(c363,931) 363,925 ccw(c363,909) 347,909 347,892 cw(c338,892) 338,883 292,883 cw(c292,894)
  region net RX: 422,813 422,831 442,831 ccw(c466.14,831) 449.07,813.93 450,813 450,804 422,804
  region net TX: 457,862 469,850 469,822 458,822 458,824 ccw(c436.27,824) 451.64,839.36 443,848
  region net CSB: 344,798 350.81,805 344.83,811.17 ccw(c338,804.34) 338,814 332.81,814 332.81,786 338.93,786 ccw(c338.93,803.07) 351,791
  region net GND: 272,789.62 279,797 287.88,788.12 cw(c282.76,783) 290,783 290,778.62 262,778.62 262,790 262.38,789.62
  region net 3V3: 374,977 374,987 364.37,987 364.37,965 368.93,965 ccw(c368.93,982.07) 381,970
  region net INTM: 390,969 381.05,960.05 cw(c377,964.09) 377,958.37 375,956.37 375,950 395,950 ccw(c395,959.66) 401.83,952.83 404,955
  region net 3V3: 282,719 292,719 292,731.38 262,731.38 262,726 ccw(c264.41,726) 262.71,724.29 275,712
  region net SCK: 332.81,724 338,724 cw(c338,719.17) 341.41,722.59 351,713 344,706 344,696 332.81,696
  region net 3V3: 676,578 693,578 693.27,577.73 693.27,568 700,561.27 700,561 691.83,552.83 cw(c685,559.66) 685,550 676,550
Mid Layer 1:
  pour cut-out: 850,1000 850,475 824.99,450 175,450 150,475 150,1000 210,1000 210,510 790,510 790,1000
  region net GND: 730,500 770,500 770,510 730,510
  region net GND: 230,500 270,500 270,510 230,510
  region net GND: 200,920 200,880 210,880 210,920
Mid Layer 2:
  pour cut-out: 850,1000 850,475 824.99,450 175,450 150,475 150,1000 210,1000 210,510 790,510 790,1000
  region net 3V3: 200,970 200,930 210,930 210,970
  region net 3V3: 430,500 470,500 470,510 430,510
Bottom Layer:
  pour cut-out: 850,1000 850,475 824.99,450 175,450 150,475 150,1000 210,1000 210,510 790,510 790,1000
  region net GND: 280,500 320,500 320,510 280,510
  region net GND: 230,500 270,500 270,510 230,510
  region net GND: 200,920 200,880 210,880 210,920

## Silkscreen, mask and mechanical layers (free items; w line width, h text height)
Top Overlay:
  circle w12: c450,350 r34
  circle w20: c747.4,298.5 r8.63
  region: 265,680 235,645 265,655 295,645
  region: 747.4,415.9 722.4,365.9 742.4,373.5 742.4,328.5 752.4,328.5 752.4,373.5 772.4,365.9
  region: 630,298.5 680,273.5 672.4,293.5 717.4,293.5 717.4,303.5 672.4,303.5 680,323.5
  region: 208,992 224,992 208,976
  lines w2: 630,298.5 680,273.5 672.4,293.5 717.4,293.5 717.4,303.5 672.4,303.5 680,323.5 630,298.5 ; 722.4,365.9 742.4,373.5 742.4,328.5 752.4,328.5 752.4,373.5 772.4,365.9 747.4,415.9 722.4,365.9
  lines w10: 208,524 208,508 224,508 ; 223,965 235,977 ; 729.9,266.69 ccw(c752.4,293.5) 778.32,317.02 ; 773.07,308.66 777.04,323.5 790.34,315.82 ; 776,508 792,508 792,524 ; 776,992 792,992 792,976 ; 208,976 208,992 224,992 208,976 ; 235,645 265,655 295,645 265,680 235,645
  lines w12: 27.03,75.07 ccw(c50,50) 72.97,75.07 ; 27.03,824.93 cw(c50,850) 27.03,875.07 ; 27.03,924.93 cw(c50,950) 72.97,924.93 ; 27.1,75 72.9,75 ; 27.1,825 72.9,825 ; 27.1,875 72.9,875 ; 27.1,925 72.9,925 ; 72.97,824.93 ccw(c50,850) 72.97,875.07
  text "C13" at 915,880 h60
  text "TX" at 20,780 h60
  text "B9" at 925,780 h60
  text "RX" at 25,680 h60
  text "B8" at 925,680 h60
  text "CSM" at 5,580 h60
  text "B7" at 925,580 h60
  text "SCK" at 10,480 h60
  text "B6" at 925,480 h60
  text "X" at 725,455 h100 r180
  text "SmartIMU" at 160,400 h120
  text "SDO" at 5,380 h60
  text "B5" at 925,380 h60
  text "v2.0" at 495,360 h60
  text "Z" at 845,285 h100 r180
  text "SDI" at 15,280 h60
  text "B4" at 925,280 h60
  text "Y" at 573,270 h100
  text "CSB" at 10,180 h60
  text "B3" at 925,180 h60
  text "SWD" at 215,150 h120
  text "VIN" at 10,85 h60
  text "A15" at 910,80 h60
Bottom Overlay:
  drawing of 2214 lines, arcs and shapes, not listed
  text "3V" at 270,935 h50
  text "KitSprout" at 525,935 h70
  text "C14" at 775,935 h50
  text "GD" at 270,885 h50
  text "C13" at 775,885 h50
  text "A2" at 270,835 h50
  text "B9" at 775,835 h50
  text "A3" at 270,785 h50
  text "B8" at 775,785 h50
  text "A4" at 270,735 h50
  text "B7" at 775,735 h50
  text "A5" at 270,685 h50
  text "B6" at 775,685 h50
  text "A6" at 270,635 h50
  text "B5" at 775,635 h50
  text "SmartIMU" at 465,610 h50
  text "A7" at 270,585 h50
  text "B4" at 775,585 h50
  text "v2.0" at 360,575 h45
  text "B0" at 270,535 h50
  text "B3" at 775,535 h50
  text "SWD" at 415,530 h50
  text "A09" at 480,515 h50 r315
  text "A10" at 530,515 h50 r315
  text "A11" at 580,515 h50 r315
  text "A12" at 630,515 h50 r315
  text "A15" at 680,515 h50 r315
  text "KitSprout" at 845,395 h110
  text "GND" at 170,300 h80 r90
  text "SWCLK" at 270,300 h80 r90
  text "SWDIO" at 370,300 h80 r90
  text "3V3" at 470,295 h80 r90
Mechanical 1:
  the board outline again, w2
Mechanical 13:
  lines w2: 200,500 800,500 800,1000 200,1000 200,500

## Dimensions
975,0 to 975,1000 on Mechanical 13
0,975 to 1000,975 on Mechanical 13